# EAGLE board MCDU_PCB (EAGLE 9.7.0)
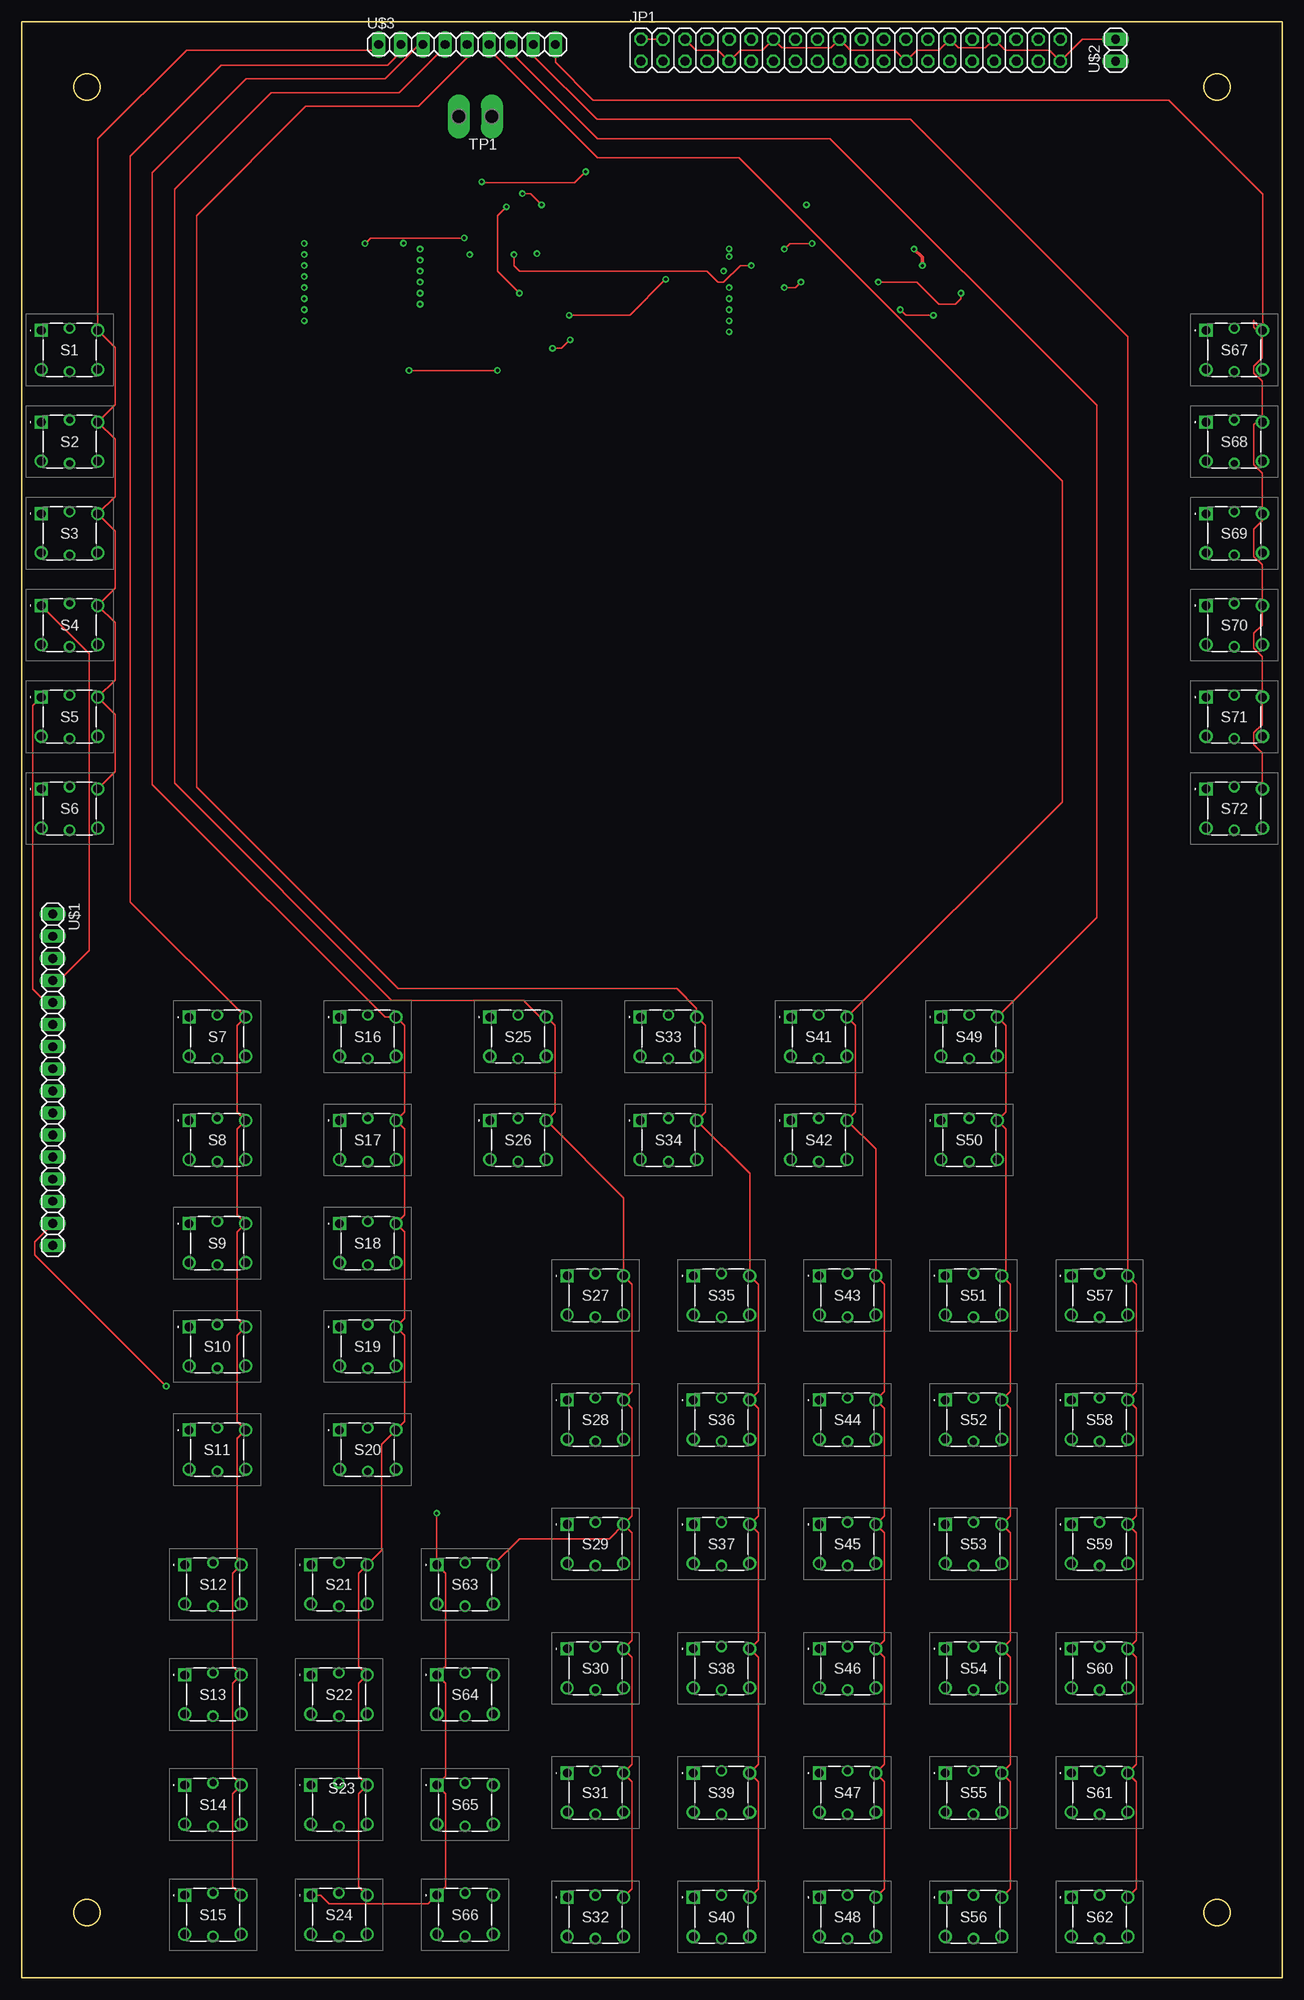
[diagram p0: board, top side]
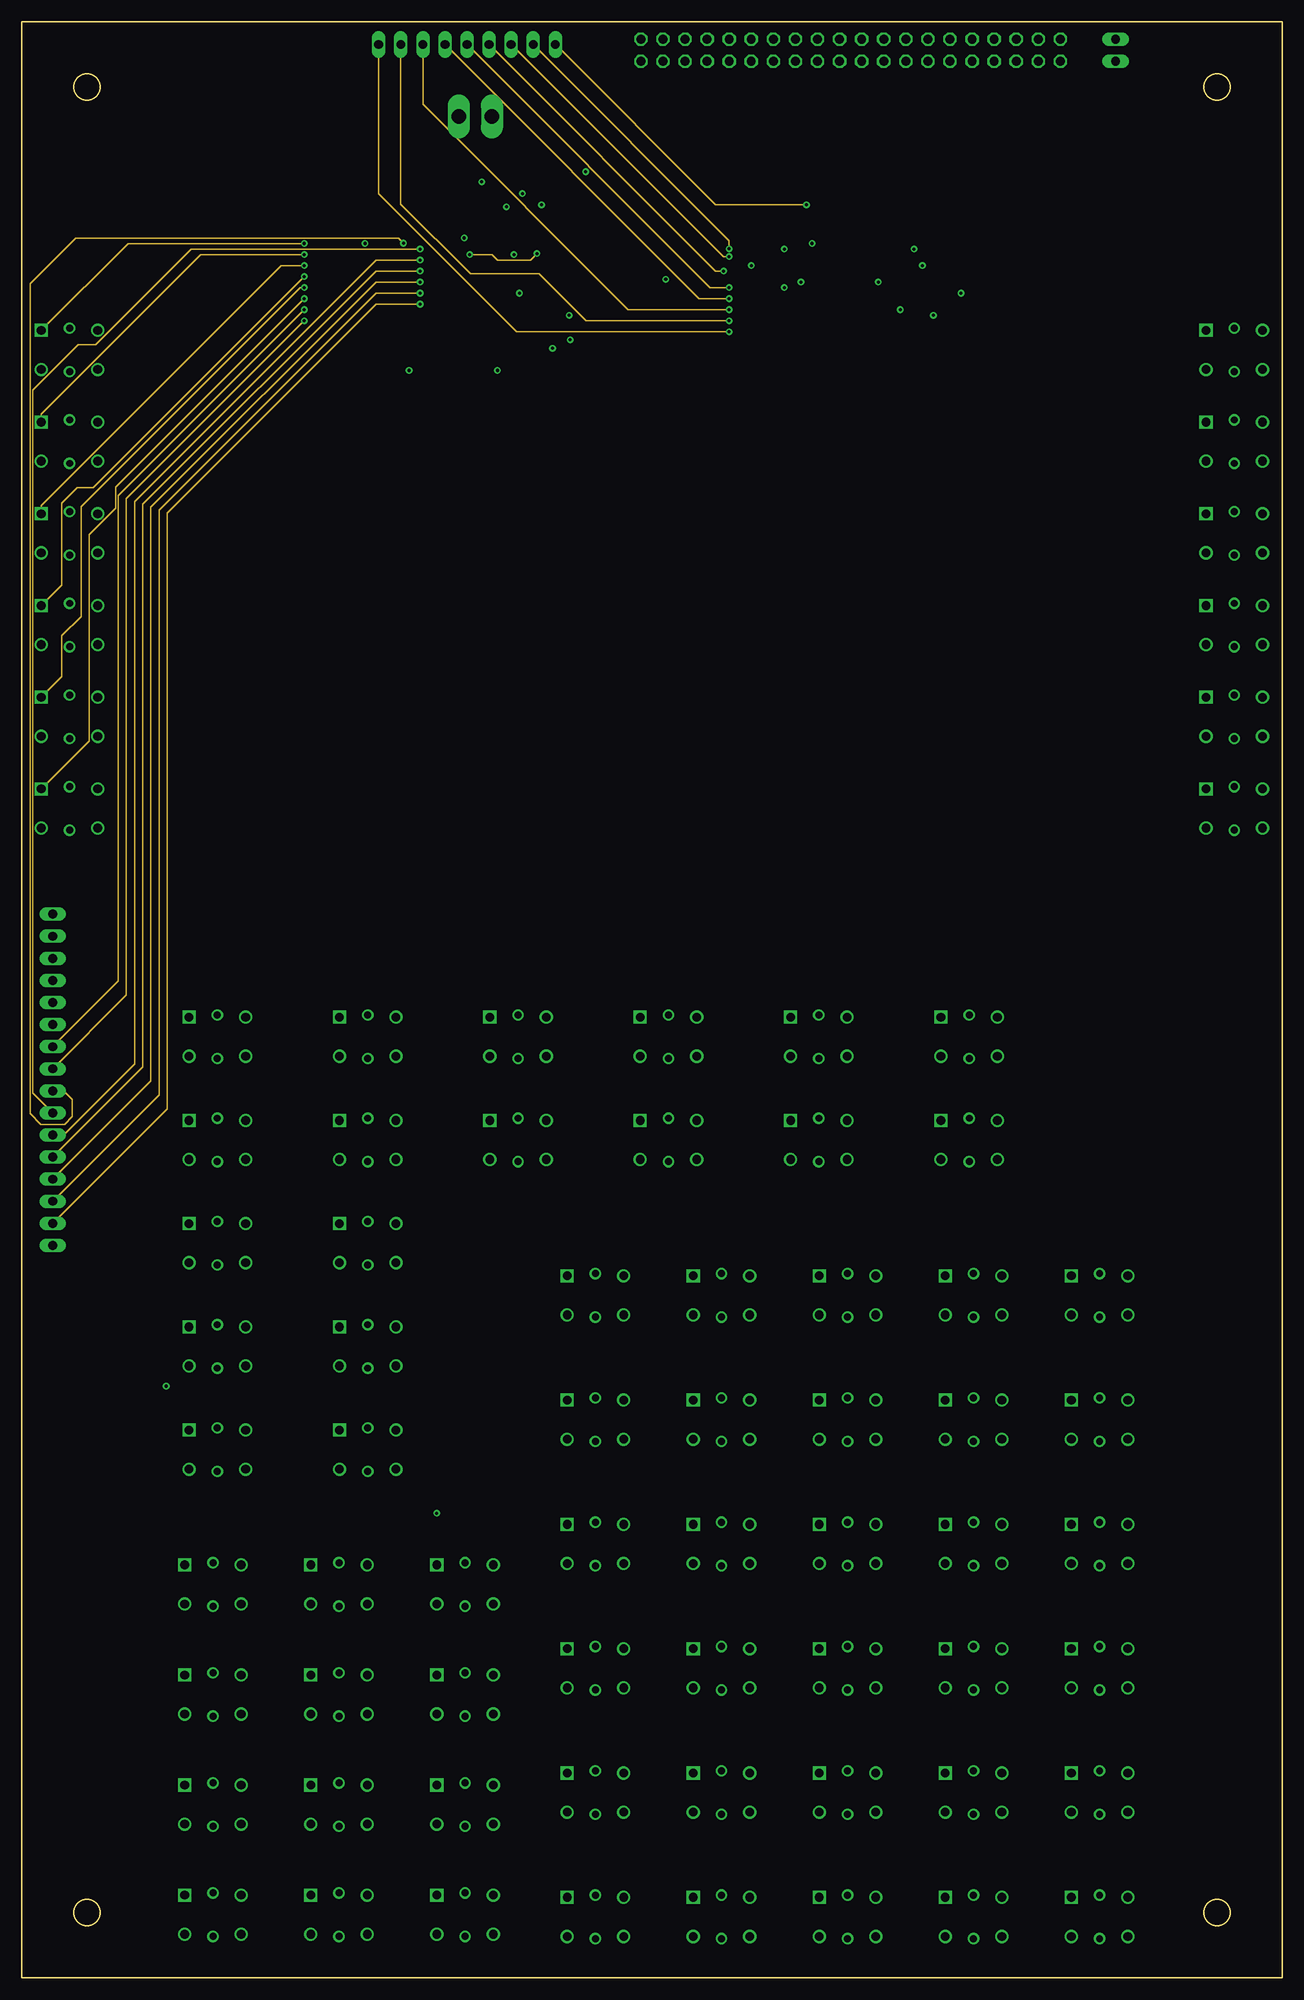
[diagram p1: board, inner layer Route2]
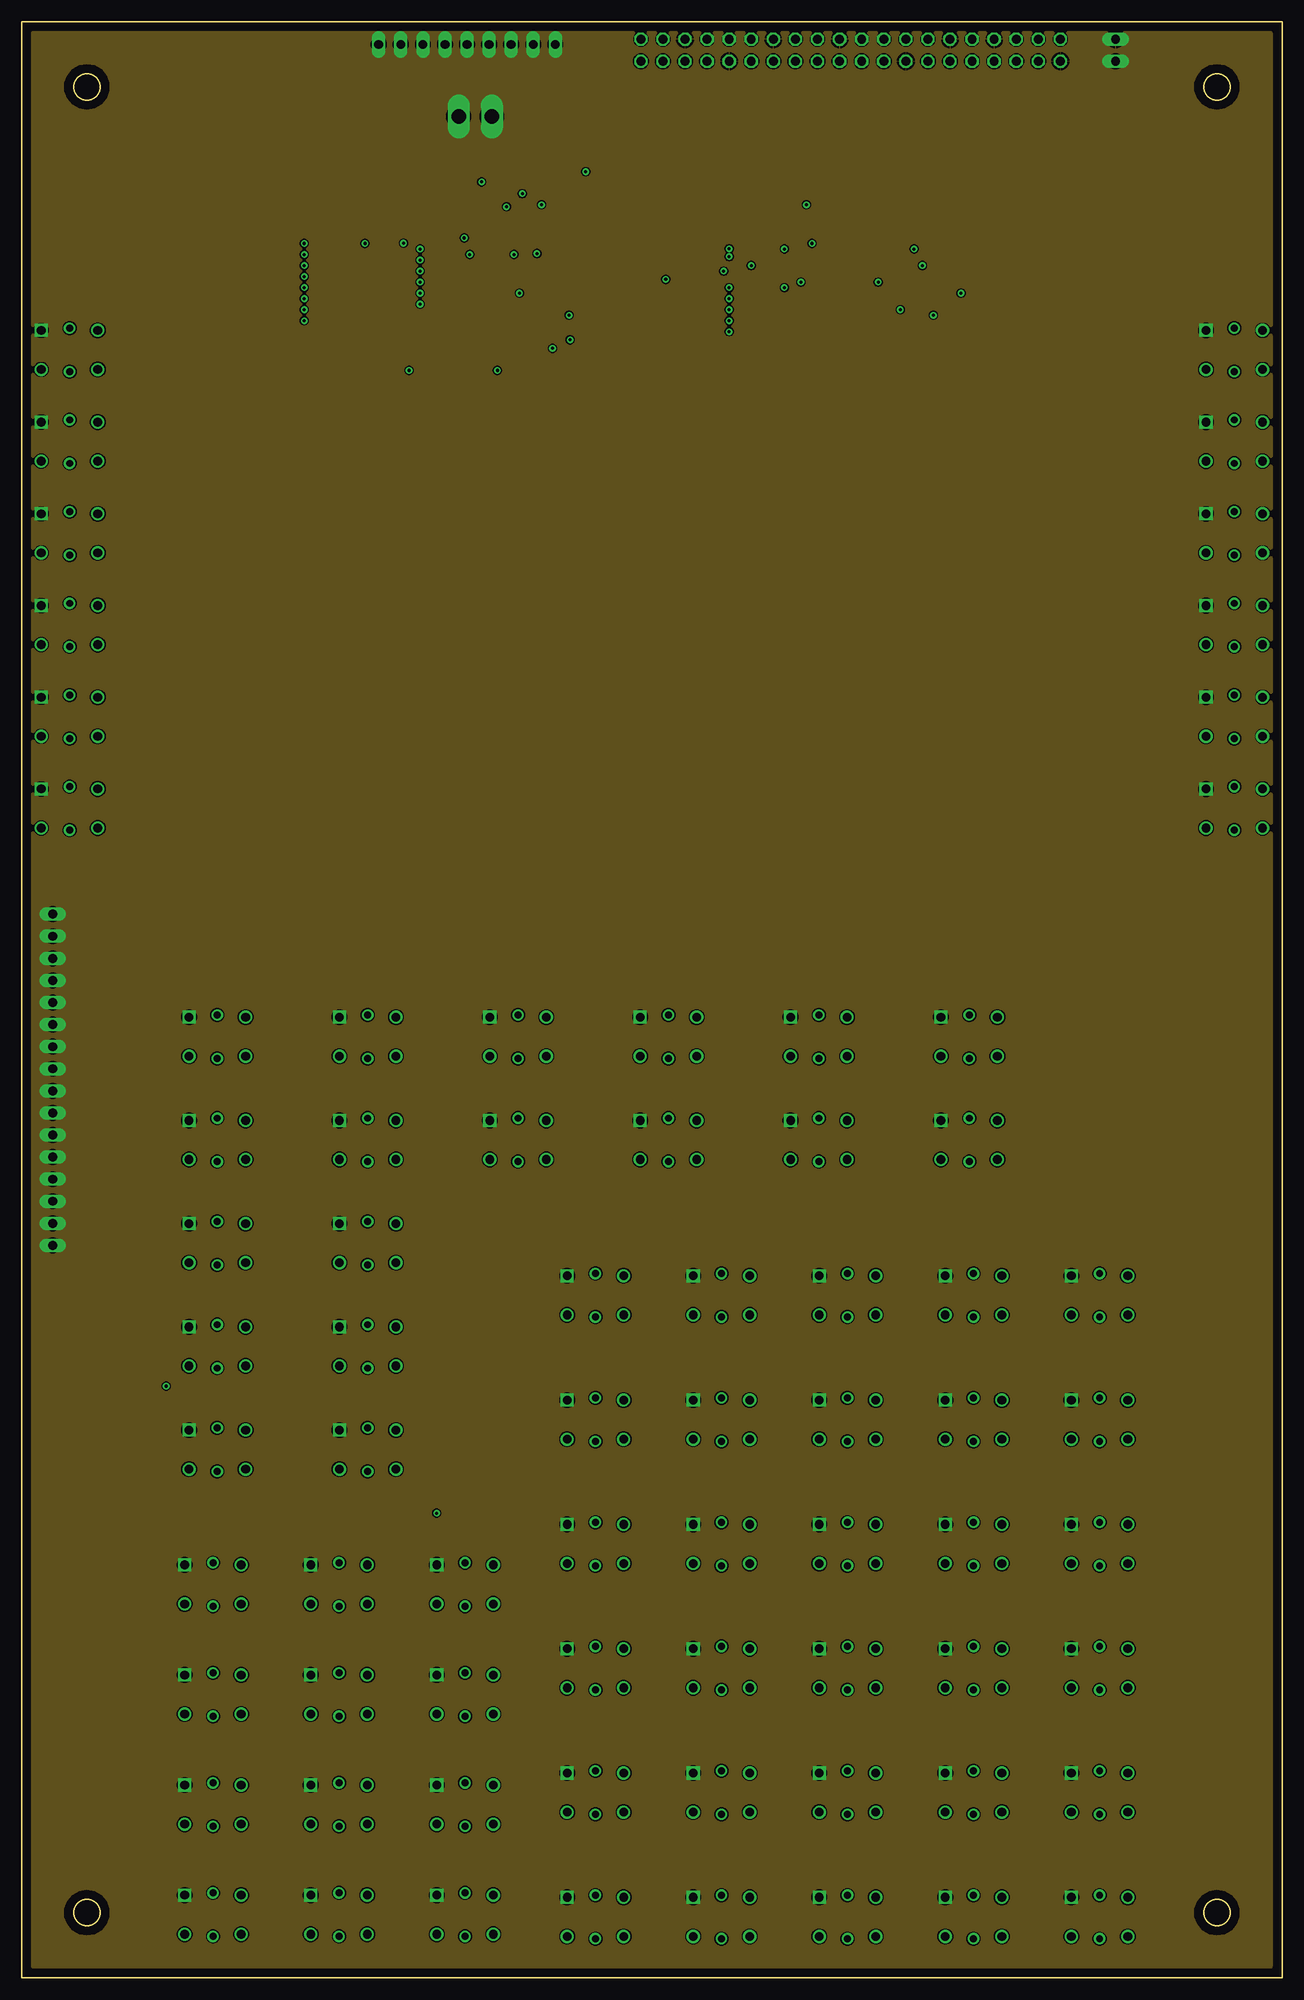
[diagram p2: board, inner layer Route15]
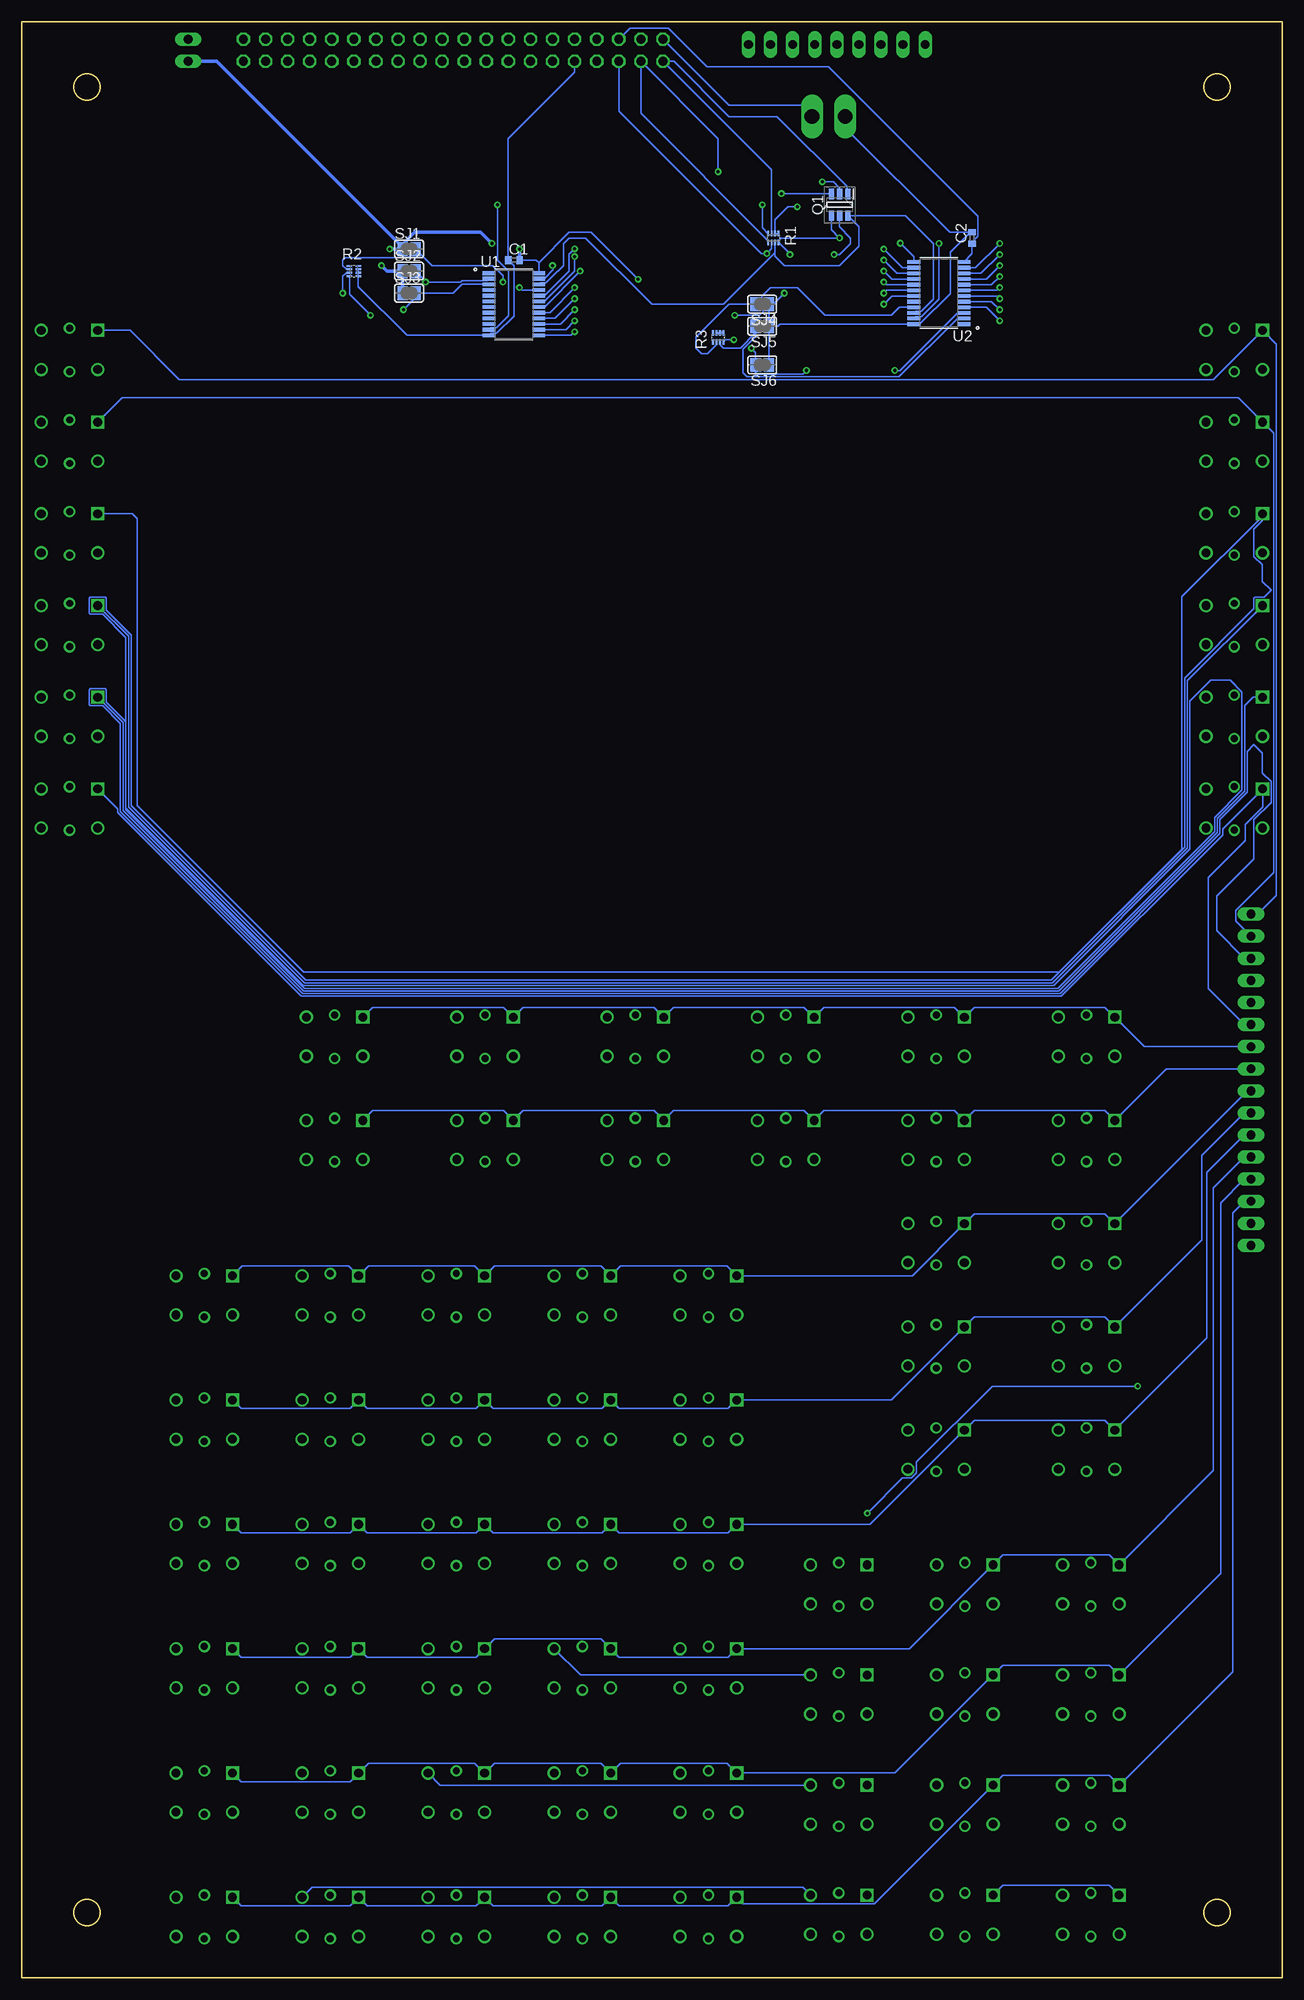
[diagram p3: board, bottom side, seen from below]

Size 145 x 225 mm. Coordinates in mm from the lower left corner, seen from the top.
Outline: 145,0 0,0 0,225 145,225 145,0
Outline: circle at 7.5,217.5 radius 1.5
Outline: circle at 137.5,217.5 radius 1.5
Outline: circle at 7.5,7.5 radius 1.5
Outline: circle at 137.5,7.5 radius 1.5
Copper layers (1+2*15+16): Top / Route2 / Route15 / Bottom
Stack-up 4 Layer Stack: Top SilkScreen Epoxy Ink / Top SolderMask SR:Green 0.0254mm Dk 4.3 / Top Surface Finish Lead-Free 0.02mm / Top CuFoil:007 0.035mm / Dielectric-1 Prepreg:001 0.064mm / Dielectric-2 Prepreg:001 0.064mm / Route2 CuFoil:007 0.035mm / Dielectric-3 Core:066 0.711mm / Route15 CuFoil:007 0.035mm / Dielectric-4 Prepreg:001 0.064mm / Dielectric-5 Prepreg:001 0.064mm / Bottom CuFoil:007 0.035mm / Bottom Surface Finish Lead-Free 0.02mm / Bottom SolderMask SR:Green 0.0254mm Dk 4.3 / Bottom SilkScreen Epoxy Ink
Design rules: minimum copper width 6mil, minimum drill size 0.35mm, copper clearance wire_polygon to wire_polygon 6mil, copper clearance wire_polygon to pad_smd 6mil, copper clearance wire_polygon to via 6mil, copper clearance pad_smd to pad_smd 6mil, copper clearance pad_smd to via 6mil, copper clearance via to via 6mil, copper clearance smd to pad (same net) 6mil, copper clearance smd to via (same net) 6mil, copper clearance smd to smd (same net) 6mil, dimension clearance 12mil, via restrict clearance 0mil, restrict clearance 0mil, drill distance 6mil, keepout clearance 0mil

## Footprints (pad centres in the part's own frame; a part is rotated, then mirrored left to right if it is on the bottom)
C0402 = smd 0.7 x 0.9: 1 -0.65,0; 2 0.65,0
2X20 = drill 1.016 octagon: 1 -24.13,-1.27; 2 -24.13,1.27; 3 -21.59,-1.27; 4 -21.59,1.27; 5 -19.05,-1.27; 6 -19.05,1.27; 7 -16.51,-1.27; 8 -16.51,1.27; 9 -13.97,-1.27; 10 -13.97,1.27; 11 -11.43,-1.27; 12 -11.43,1.27; 13 -8.89,-1.27; 14 -8.89,1.27; 15 -6.35,-1.27; 16 -6.35,1.27; 17 -3.81,-1.27; 18 -3.81,1.27; 19 -1.27,-1.27; 20 -1.27,1.27; 21 1.27,-1.27; 22 1.27,1.27; 23 3.81,-1.27; 24 3.81,1.27; 25 6.35,-1.27; 26 6.35,1.27; 27 8.89,-1.27; 28 8.89,1.27; 29 11.43,-1.27; 30 11.43,1.27; 31 13.97,-1.27; 32 13.97,1.27; 33 16.51,-1.27; 34 16.51,1.27; 35 19.05,-1.27; 36 19.05,1.27; 37 21.59,-1.27; 38 21.59,1.27; 39 24.13,-1.27; 40 24.13,1.27
SOT95P280X110-6N = smd 1.2 x 0.6: 1 -1.25,0.95; 2 -1.25,0; 3 -1.25,-0.95; 4 1.25,-0.95; 5 1.25,0; 6 1.25,0.95
EXB-18V103JX = smd 0.64 x 0.21: 1 -0.505,0.6; 2 -0.505,0.2; 3 -0.505,-0.2; 4 -0.505,-0.6; 5 0.505,-0.6; 6 0.505,-0.2; 7 0.505,0.2; 8 0.505,0.6
FSMIJ63AA04 = drill 1 pad 1.5 square: 1 0,0 | drill 1 pad 1.5: 2 6.5,0; 3 0,-4.5; 4 6.5,-4.5 | drill 0.8 pad 1.3: 5 3.25,-4.75; 6 3.25,0.25
SJ = smd 1.168 x 1.6: 1 -0.762,0; 2 0.762,0
P2-38-17 = drill 1.702 pad 2.121 long: TP-1 -1.905,0; TP-2 1.905,0
SOP65P640X120-24N = smd 1.57 x 0.41: 1 -2.87,3.575; 2 -2.87,2.925; 3 -2.87,2.275; 4 -2.87,1.625; 5 -2.87,0.975; 6 -2.87,0.325; 7 -2.87,-0.325; 8 -2.87,-0.975; 9 -2.87,-1.625; 10 -2.87,-2.275; 11 -2.87,-2.925; 12 -2.87,-3.575; 13 2.87,-3.575; 14 2.87,-2.925; 15 2.87,-2.275; 16 2.87,-1.625; 17 2.87,-0.975; 18 2.87,-0.325; 19 2.87,0.325; 20 2.87,0.975; 21 2.87,1.625; 22 2.87,2.275; 23 2.87,2.925; 24 2.87,3.575
1X16 = drill 1.016 long: 1 -19.05,0; 2 -16.51,0; 3 -13.97,0; 4 -11.43,0; 5 -8.89,0; 6 -6.35,0; 7 -3.81,0; 8 -1.27,0; 9 1.27,0; 10 3.81,0; 11 6.35,0; 12 8.89,0; 13 11.43,0; 14 13.97,0; 15 16.51,0; 16 19.05,0
1X02 = drill 1.016 long: 1 -1.27,0; 2 1.27,0
1X09 = drill 1.016 long: 1 -10.16,0; 2 -7.62,0; 3 -5.08,0; 4 -2.54,0; 5 0,0; 6 2.54,0; 7 5.08,0; 8 7.62,0; 9 10.16,0

## Placement (x,y rotation side)
C1  [C0402]  88.38,197.59 0 bottom
C2  [C0402]  35.67,200.13 90 bottom
JP1  PINHD-2X20  [2X20]  95.36,221.72 0 top
Q1  FDC6301N  [SOT95P280X110-6N]  50.91,203.94 270 bottom
R1  EXB-18V103JX  [EXB-18V103JX]  58.53,200.13 270 bottom
R2  EXB-18V103JX  [EXB-18V103JX]  106.79,196.32 0 bottom
R3  EXB-18V103JX  [EXB-18V103JX]  64.88,188.7 90 bottom
S1  FSMIJ63AA04  [FSMIJ63AA04]  2.25,189.5 0 top
S2  FSMIJ63AA04  [FSMIJ63AA04]  2.25,178.95 0 top
S3  FSMIJ63AA04  [FSMIJ63AA04]  2.25,168.4 0 top
S4  FSMIJ63AA04  [FSMIJ63AA04]  2.25,157.85 0 top
S5  FSMIJ63AA04  [FSMIJ63AA04]  2.25,147.3 0 top
S6  FSMIJ63AA04  [FSMIJ63AA04]  2.25,136.75 0 top
S7  FSMIJ63AA04  [FSMIJ63AA04]  19.25,110.5 0 top
S8  FSMIJ63AA04  [FSMIJ63AA04]  19.25,98.62 0 top
S9  FSMIJ63AA04  [FSMIJ63AA04]  19.25,86.75 0 top
S10  FSMIJ63AA04  [FSMIJ63AA04]  19.25,74.88 0 top
S11  FSMIJ63AA04  [FSMIJ63AA04]  19.25,63 0 top
S12  FSMIJ63AA04  [FSMIJ63AA04]  18.75,47.5 0 top
S13  FSMIJ63AA04  [FSMIJ63AA04]  18.75,34.83 0 top
S14  FSMIJ63AA04  [FSMIJ63AA04]  18.75,22.17 0 top
S15  FSMIJ63AA04  [FSMIJ63AA04]  18.75,9.5 0 top
S16  FSMIJ63AA04  [FSMIJ63AA04]  36.55,110.5 0 top
S17  FSMIJ63AA04  [FSMIJ63AA04]  36.55,98.62 0 top
S18  FSMIJ63AA04  [FSMIJ63AA04]  36.55,86.75 0 top
S19  FSMIJ63AA04  [FSMIJ63AA04]  36.55,74.88 0 top
S20  FSMIJ63AA04  [FSMIJ63AA04]  36.55,63 0 top
S21  FSMIJ63AA04  [FSMIJ63AA04]  33.25,47.5 0 top
S22  FSMIJ63AA04  [FSMIJ63AA04]  33.25,34.83 0 top
S23  FSMIJ63AA04  [FSMIJ63AA04]  33.25,22.17 0 top
S24  FSMIJ63AA04  [FSMIJ63AA04]  33.25,9.5 0 top
S25  FSMIJ63AA04  [FSMIJ63AA04]  53.85,110.5 0 top
S26  FSMIJ63AA04  [FSMIJ63AA04]  53.85,98.62 0 top
S27  FSMIJ63AA04  [FSMIJ63AA04]  62.75,80.75 0 top
S28  FSMIJ63AA04  [FSMIJ63AA04]  62.75,66.45 0 top
S29  FSMIJ63AA04  [FSMIJ63AA04]  62.75,52.15 0 top
S30  FSMIJ63AA04  [FSMIJ63AA04]  62.75,37.85 0 top
S31  FSMIJ63AA04  [FSMIJ63AA04]  62.75,23.55 0 top
S32  FSMIJ63AA04  [FSMIJ63AA04]  62.75,9.25 0 top
S33  FSMIJ63AA04  [FSMIJ63AA04]  71.15,110.5 0 top
S34  FSMIJ63AA04  [FSMIJ63AA04]  71.15,98.62 0 top
S35  FSMIJ63AA04  [FSMIJ63AA04]  77.25,80.75 0 top
S36  FSMIJ63AA04  [FSMIJ63AA04]  77.25,66.45 0 top
S37  FSMIJ63AA04  [FSMIJ63AA04]  77.25,52.15 0 top
S38  FSMIJ63AA04  [FSMIJ63AA04]  77.25,37.85 0 top
S39  FSMIJ63AA04  [FSMIJ63AA04]  77.25,23.55 0 top
S40  FSMIJ63AA04  [FSMIJ63AA04]  77.25,9.25 0 top
S41  FSMIJ63AA04  [FSMIJ63AA04]  88.45,110.5 0 top
S42  FSMIJ63AA04  [FSMIJ63AA04]  88.45,98.62 0 top
S43  FSMIJ63AA04  [FSMIJ63AA04]  91.75,80.75 0 top
S44  FSMIJ63AA04  [FSMIJ63AA04]  91.75,66.45 0 top
S45  FSMIJ63AA04  [FSMIJ63AA04]  91.75,52.15 0 top
S46  FSMIJ63AA04  [FSMIJ63AA04]  91.75,37.85 0 top
S47  FSMIJ63AA04  [FSMIJ63AA04]  91.75,23.55 0 top
S48  FSMIJ63AA04  [FSMIJ63AA04]  91.75,9.25 0 top
S49  FSMIJ63AA04  [FSMIJ63AA04]  105.75,110.5 0 top
S50  FSMIJ63AA04  [FSMIJ63AA04]  105.75,98.62 0 top
S51  FSMIJ63AA04  [FSMIJ63AA04]  106.25,80.75 0 top
S52  FSMIJ63AA04  [FSMIJ63AA04]  106.25,66.45 0 top
S53  FSMIJ63AA04  [FSMIJ63AA04]  106.25,52.15 0 top
S54  FSMIJ63AA04  [FSMIJ63AA04]  106.25,37.85 0 top
S55  FSMIJ63AA04  [FSMIJ63AA04]  106.25,23.55 0 top
S56  FSMIJ63AA04  [FSMIJ63AA04]  106.25,9.25 0 top
S57  FSMIJ63AA04  [FSMIJ63AA04]  120.75,80.75 0 top
S58  FSMIJ63AA04  [FSMIJ63AA04]  120.75,66.45 0 top
S59  FSMIJ63AA04  [FSMIJ63AA04]  120.75,52.15 0 top
S60  FSMIJ63AA04  [FSMIJ63AA04]  120.75,37.85 0 top
S61  FSMIJ63AA04  [FSMIJ63AA04]  120.75,23.55 0 top
S62  FSMIJ63AA04  [FSMIJ63AA04]  120.75,9.25 0 top
S63  FSMIJ63AA04  [FSMIJ63AA04]  47.75,47.5 0 top
S64  FSMIJ63AA04  [FSMIJ63AA04]  47.75,34.83 0 top
S65  FSMIJ63AA04  [FSMIJ63AA04]  47.75,22.17 0 top
S66  FSMIJ63AA04  [FSMIJ63AA04]  47.75,9.5 0 top
S67  FSMIJ63AA04  [FSMIJ63AA04]  136.25,189.5 0 top
S68  FSMIJ63AA04  [FSMIJ63AA04]  136.25,178.95 0 top
S69  FSMIJ63AA04  [FSMIJ63AA04]  136.25,168.4 0 top
S70  FSMIJ63AA04  [FSMIJ63AA04]  136.25,157.85 0 top
S71  FSMIJ63AA04  [FSMIJ63AA04]  136.25,147.3 0 top
S72  FSMIJ63AA04  [FSMIJ63AA04]  136.25,136.75 0 top
SJ1  [SJ]  100.44,198.86 0 bottom
SJ2  [SJ]  100.44,196.32 0 bottom
SJ3  [SJ]  100.44,193.78 0 bottom
SJ4  [SJ]  59.8,192.51 180 bottom
SJ5  [SJ]  59.8,189.97 180 bottom
SJ6  [SJ]  59.8,185.53 180 bottom
TP1  PTR2  [P2-38-17]  52.18,214.1 180 top
U1  TCA9535PWR  [SOP65P640X120-24N]  88.38,192.51 0 bottom
U2  TCA9535PWR  [SOP65P640X120-24N]  39.48,193.78 180 bottom
U$1  PINHD-1X16_1X16M  [1X16]  3.57,103.29 270 top
U$2  PINHD-1X02_1X02M  [1X02]  125.84,221.72 90 top
U$3  PINHD-1X09_1X09M  [1X09]  51.23,222.38 0 top

## Library data of the parts
C1 C2 = rcl; SPICEPREFIX: C
JP1 = Connector; CATEGORY: Headers; DESCRIPTION: Header-Straight-2x20 Position; PACKAGE_TYPE: THT; PITCH: 0.100" (2.54mm); SUBCATEGORY: Headers-Male Pins; TYPE: Board to Board or Cable-Unshrouded-Through Hole-Straight
Q1 = FDC6301N; ARROW_PART_NUMBER: FDC6301N; ARROW_PRICE-STOCK: https://www.arrow.com/en/products/fdc6301n/on-semiconductor?utm_currency=USD&region=europe; DESCRIPTION: 25 V, 0.22 A continuous, 0.5 A Peak ; Very low level gate drive requirements allowing direct operation in 3V circuits. VGS(th) < 1.5V ; Gate-Source Zener for ESD ruggedness. >6kV Human Body Model ; RDS(ON) = 4 @ VGS= 4.5 V; RDS(ON) = 5 @ VGS= 2.7 V; HEIGHT: 1.1mm; MANUFACTURER_NAME: onsemi; MANUFACTURER_PART_NUMBER: FDC6301N; MOUSER_PART_NUMBER: 512-FDC6301N; MOUSER_PRICE-STOCK: https://www.mouser.co.uk/ProductDetail/onsemi-Fairchild/FDC6301N?qs=mdiO5HdF0KgxuYQMe08%2FpQ%3D%3D
R1-R3 = Resistor Array; CREATED_BY: PCBLayout.com; DIGIEKEY_PARTNO: Y6103TR-ND; MANUFACTURER: Panasonic Electronic Components; MPN: EXB-18V103JX; PACKAGE: 0502
S1-S72 = FSMIJ63AA04; DESCRIPTION: Body Features: Product Orientation Vertical | Actuator Color Brown | Actuator Force 9.17 OZ | Actuator Force 260 G | Configuration Features: Operating Function Off (On) | Number of Actuators Single | Configuration (Pole-Throw) Single Pole - Single Throw | Contact Features: Contact Current Rating 50 MAMP | Contact Base Material Brass | Switch Contact Plating Material Silver | Housing Features: Process Sealed No | Product Type Features: Illuminated With | Actuator Style Rectangular | Termination Features: Ter; HEIGHT: 7mm; MANUFACTURER_NAME: TE Connectivity; MANUFACTURER_PART_NUMBER: FSMIJ63AA04; MOUSER_PART_NUMBER: 506-FSMIJ63AA04; MOUSER_PRICE-STOCK: https://www.mouser.co.uk/ProductDetail/TE-Connectivity-AMP/FSMIJ63AA04?qs=oOQ3ApaRe9AOcHRaMIhZDw%3D%3D
SJ1-SJ6 = jumper
TP1 = testpad
U1 U2 = TCA9535PWR; AVAILABILITY: In Stock; CHECK_PRICES: https://www.snapeda.com/parts/TCA9535PWR/Texas+Instruments/view-part/?ref=eda; DESCRIPTION: 16-bit 1.65- to 5.5-V I2C/SMBus I/O expander with interrupt & config registers; MF: Texas Instruments; MP: TCA9535PWR; PACKAGE: TSSOP-24 Texas Instruments; PRICE: None; PURCHASE-URL: https://www.snapeda.com/api/url_track_click_mouser/?unipart_id=1237891&manufacturer=Texas Instruments&part_name=TCA9535PWR&search_term=None; SNAPEDA_LINK: https://www.snapeda.com/parts/TCA9535PWR/Texas+Instruments/view-part/?ref=snap
U$1-U$3 = Tinkercad

## Nets
+3.3V: JP1.1 Q1.1 R1.3
GND: C1.1 C2.1 JP1.6 JP1.9 JP1.14 JP1.20 JP1.25 JP1.30 JP1.34 JP1.39 R2.5 R2.6 R2.7 U1.12 U2.12 U$2.2
GND1: R3.5 R3.6 R3.7
N$1: S1.2 S2.2 S3.2 S4.2 S5.2 S6.2 U1.13 U$3.1
N$2: S7.2 S8.2 S9.2 S10.2 S11.2 S12.2 S13.2 S14.2 S15.2 U1.14 U$3.2
N$3: S16.2 S17.2 S18.2 S19.2 S20.2 S21.2 S22.2 S23.2 S24.2 U1.15 U$3.3
N$4: S25.2 S26.2 S27.2 S28.2 S29.2 S30.2 S31.2 S32.2 S63.2 U1.16 U$3.4
N$5: S33.2 S34.2 S35.2 S36.2 S37.2 S38.2 S39.2 S40.2 S64.2 U1.17 U$3.5
N$6: S41.2 S42.2 S43.2 S44.2 S45.2 S46.2 S47.2 S48.2 S65.2 U1.18 U$3.6
N$7: S49.2 S50.2 S51.2 S52.2 S53.2 S54.2 S55.2 S56.2 S66.2 U1.19 U$3.7
N$8: S57.2 S58.2 S59.2 S60.2 S61.2 S62.2 U1.20 U$3.8
N$9: S67.2 S68.2 S69.2 S70.2 S71.2 S72.2 U1.11 U$3.9
N$10: S1.1 S67.1 U2.11 U$1.1
N$11: S2.1 S68.1 U2.10 U$1.2
N$12: S3.1 S69.1 U2.9 U$1.3
N$13: S4.1 S70.1 U2.8 U$1.4
N$14: S5.1 S71.1 U2.7 U$1.5
N$15: S6.1 S72.1 U2.6 U$1.6
N$16: S7.1 S16.1 S25.1 S33.1 S41.1 S49.1 U2.5 U$1.7
N$17: S8.1 S17.1 S26.1 S34.1 S42.1 S50.1 U2.4 U$1.8
N$18: S9.1 S18.1 S27.1 S35.1 S43.1 S51.1 S57.1 U2.13 U$1.9
N$19: S10.1 S19.1 S28.1 S36.1 S44.1 S52.1 S58.1 U2.14 U$1.10
N$20: S11.1 S20.1 S29.1 S37.1 S45.1 S53.1 S59.1 U2.15 U$1.11
N$21: S12.1 S21.1 S30.1 S38.1 S46.1 S54.1 S60.1 U2.16 U$1.12
N$22: S13.1 S22.1 S31.1 S39.1 S47.1 S55.1 S61.1 U2.17 U$1.13
N$23: S14.1 S23.1 S32.1 S40.1 S48.1 S56.1 S62.1 U2.18 U$1.14
N$24: S15.1 S24.1 S63.1 S64.1 S65.1 S66.1 U2.19 U$1.15
N$26: S57.3
N$27: JP1.2 JP1.4 TP1.TP-1
N$28: JP1.5 Q1.5 R1.6
N$29: JP1.3 Q1.2 R1.5
N$30: Q1.3 R1.4
N$31: Q1.6 R1.7 U1.22 U2.22
N$32: Q1.4 R1.8 U1.23 U2.23
N$33: R2.2 SJ1.2 U1.21
N$34: R2.3 SJ2.2 U1.2
N$35: R2.4 SJ3.2 U1.3
N$36: R3.2 SJ4.2 U2.21
N$37: R3.3 SJ5.2 U2.2
N$38: R3.4 SJ6.2 U2.3
VDD: C1.2 C2.2 R1.1 R1.2 SJ1.1 SJ2.1 SJ3.1 SJ4.1 SJ5.1 SJ6.1 TP1.TP-2 U1.24 U2.24 U$2.1

## Tracks (layer width: path | path; a pad name or v marks a point on that pad's centre or on a via)
+3.3V
  Bottom 0.152: R1.3 58.73,207.95 JP1.1 69.96,220.45 63.61,214.1 58.1,214.1 50.06,206.06 50.06,205.29 Q1.1
GND
  Top 0.152: JP1.6 77.58,221.72 80.12,221.72 JP1.9 82.66,221.72 85.2,221.72 JP1.14 87.46,222 93.1,222 JP1.20 95.36,221.72 100.44,221.72 JP1.25 102.98,221.72 105.52,221.72 JP1.30 107.78,222 110.88,222 JP1.34 113.14,221.72 118.22,221.72 JP1.39 122.03,222.99 U$2.2
  Bottom 0.152: U2.12 35.67,198.3 C2.1 35.67,199.66 34.99,200.33 34.99,202.63 52.18,219.81 66.15,219.81 70.59,224.26 75.04,224.26 JP1.6 | R2.7 R2.6 R2.5 106.28,194.55 100.67,188.94 U1.12 91.03,189.15 90.39,189.15 88.39,191.16 88.39,196.95 C1.1 89.03,211.55 81.39,219.18 JP1.9
  pour Route15: 0.11,224.89 144.89,224.89 144.89,0.11 0.11,0.11
GND1
  Bottom 0.254: R3.7 R3.6 R3.5
N$1  (via drill 0.35)
  Top 0.152: U$3.1 40.43,221.75 18.97,221.75 8.75,211.53 S1.2 10.73,187.52 10.73,180.93 S2.2 10.73,176.97 10.73,170.38 S3.2 10.73,166.42 10.73,159.83 S4.2 10.73,155.87 10.73,149.28 S5.2 10.73,145.32 10.73,138.73 S6.2
  Route2 0.152: v81.39,189.33 56.92,189.33 41.07,205.19 U$3.1
  Bottom 0.152: U1.13 81.79,188.94 v81.39,189.33
N$2  (via drill 0.35)
  Top 0.152: S15.2 24.27,10.48 24.27,21.18 S14.2 24.27,23.15 24.27,33.85 S13.2 24.27,35.82 24.27,46.52 S12.2 24.77,47.98 24.77,62.02 S11.2 24.77,63.98 24.77,73.89 S10.2 24.77,75.86 24.77,85.77 S9.2 24.77,87.73 24.77,97.64 S8.2 24.77,99.61 24.77,109.52 S7.2 12.49,123.76 12.49,209.56 22.93,220 42.11,220 43.61,221.49 U$3.2
  Route2 0.152: v81.39,190.61 64.93,190.61 59.53,196 51.64,196 43.61,204.03 U$3.2
  Bottom 0.152: U1.14 82.41,189.58 v81.39,190.61
N$3  (via drill 0.35)
  Top 0.152: S24.2 38.77,10.48 38.77,21.18 S23.2 38.77,23.15 38.77,33.85 S22.2 38.77,35.82 38.77,46.52 S21.2 41.4,49.15 41.4,61.35 S20.2 44.03,63.98 44.03,73.89 S19.2 44.03,75.86 44.03,85.77 S18.2 44.03,87.73 44.03,97.64 S17.2 44.03,99.61 44.03,109.52 S16.2 41.78,110.5 15.03,137.25 15.03,207.65 25.8,218.42 41.81,218.42 45.77,222.38 U$3.3
  Route2 0.152: v81.39,191.88 69.77,191.88 46.15,215.5 U$3.3
  Route15 0.152: 46.21,222.38 U$3.3
  Bottom 0.152: U1.15 83.03,190.24 v81.39,191.88
N$4  (via drill 0.35)
  Top 0.152: S29.2 70.23,53.13 70.23,65.47 S28.2 70.23,67.43 70.23,79.77 S27.2 69.25,89.72 S26.2 61.33,99.61 61.33,109.52 S25.2 59.64,110.5 57.73,112.41 42.57,112.41 17.57,137.4 17.57,205.75 28.67,216.85 43.41,216.85 48.69,222.13 U$3.4 | S29.2 70.23,51.17 70.23,38.83 S30.2 70.23,36.87 70.23,24.53 S31.2 70.23,22.57 70.23,10.23 S32.2 | S63.2 57.25,50.5 67.6,50.5 S29.2
  Route2 0.152: v81.39,193.14 77.93,193.14 U$3.4
  Bottom 0.152: U1.16 83.65,190.88 v81.39,193.14
N$5  (via drill 0.35)
  Top 0.152: S40.2 84.73,10.23 84.73,22.57 S39.2 84.73,24.53 84.73,36.87 S38.2 84.73,38.83 84.73,51.17 S37.2 84.73,53.13 84.73,65.47 S36.2 84.73,67.43 84.73,79.77 S35.2 83.75,92.53 S34.2 78.63,99.61 78.63,109.52 S33.2 77.65,111.52 75.4,113.77 43.29,113.77 20.11,136.95 20.11,202.7 32.69,215.27 45.64,215.27 51.23,220.86 U$3.5
  Route2 0.152: v81.39,194.42 79.2,194.42 U$3.5
  Bottom 0.152: S64.2 80.73,34.83 S38.2 | U1.17 84.24,191.53 81.39,194.38 v81.39,194.42
N$6  (via drill 0.35)
  Top 0.152: S48.2 99.23,10.23 99.23,22.57 S47.2 99.23,24.53 99.23,36.87 S46.2 99.23,38.83 99.23,51.17 S45.2 99.23,53.13 99.23,65.47 S44.2 99.23,67.43 99.23,79.77 S43.2 98.25,95.33 S42.2 95.93,99.61 95.93,109.52 S41.2 119.72,135.26 119.72,172.16 82.51,209.36 66.21,209.36 53.77,221.81 U$3.6
  Route2 0.152: v80.75,196.32 79.83,196.32 U$3.6
  Bottom 0.152: S65.2 96.87,22.17 S47.2 | U1.18 84.87,192.19 80.75,196.3 v80.75,196.32
N$7  (via drill 0.35)
  Top 0.152: S56.2 113.73,10.23 113.73,22.57 S55.2 113.73,24.53 113.73,36.87 S54.2 113.73,38.83 113.73,51.17 S53.2 113.73,53.13 113.73,65.47 S52.2 113.73,67.43 113.73,79.77 S51.2 113.23,81.23 113.23,97.64 S50.2 113.23,99.61 113.23,109.52 S49.2 123.68,121.93 123.68,180.89 93,211.57 66.23,211.57 56.31,221.49 U$3.7
  Route2 0.152: v81.39,197.98 80.71,197.98 U$3.7
  Bottom 0.152: S66.2 55.13,10.38 111.62,10.38 S56.2 | U1.19 84.87,192.83 81.39,196.32 v81.39,197.98
N$8  (via drill 0.35)
  Top 0.152: S62.2 128.23,10.23 128.23,22.57 S61.2 128.23,24.53 128.23,36.87 S60.2 128.23,38.83 128.23,51.17 S59.2 128.23,53.13 128.23,65.47 S58.2 128.23,67.43 128.23,79.77 S57.2 127.25,188.75 102.22,213.78 66.18,213.78 58.85,221.11 U$3.8
  Route2 0.152: v81.39,198.89 81.39,199.84 U$3.8
  Bottom 0.152: 84.87,193.49 U1.20 84.86,193.49 82.03,196.32 82.03,198.25 v81.39,198.89
N$9  (via drill 0.35)
  Top 0.152: S72.2 142.73,136.77 142.73,140.88 141.77,141.84 141.77,143.21 142.73,144.17 142.73,147.28 S71.2 142.73,147.32 142.73,151.98 141.77,152.94 141.77,154.66 142.73,155.62 142.73,157.83 S70.2 142.73,157.87 142.73,162.53 141.77,163.49 141.77,166.66 142.73,167.62 142.73,168.38 S69.2 142.73,168.42 142.73,173.08 141.77,174.04 141.77,178.66 142.06,178.95 S68.2 142.73,178.97 142.73,183.63 141.77,184.59 141.77,185.41 142.73,186.37 142.73,188.88 141.77,189.84 141.77,190.66 141.68,190.57 S67.2 142.75,205.18 131.94,215.99 65.72,215.99 61.39,220.32 U$3.9
  Route2 0.152: v90.28,203.94 79.83,203.94 U$3.9
  Bottom 0.152: U1.11 91.03,189.8 90.39,189.8 89.01,191.19 89.01,196.32 90.28,197.59 v90.28,203.94
N$10  (via drill 0.35)
  Route2 0.152: v32.49,199.5 12.24,199.5 S1.1
  Bottom 0.152: U$1.1 2.81,122.34 0.66,124.49 0.66,187.91 S1.1 7.89,183.86 126.9,183.86 132.54,189.5 S67.1 | U2.11 35.28,196.7 v32.49,199.5
N$11  (via drill 0.35)
  Route2 0.152: v32.49,198.22 20.59,198.22 2.25,179.89 S2.1
  Bottom 0.152: U$1.2 5.32,121.56 5.32,122.75 0.96,127.11 0.96,177.66 S2.1 5.07,181.77 133.43,181.77 S68.1 | U2.10 34.66,196.06 v32.49,198.22
N$12  (via drill 0.35)
  Route2 0.152: v32.49,196.95 29.87,196.95 2.25,169.34 S3.1
  Bottom 0.152: U$1.3 4.33,117.26 7.53,120.46 7.53,124.4 3.23,128.7 3.23,133.23 1.27,135.19 1.27,137.6 2.27,138.6 2.27,140.88 3.23,141.84 4.01,141.07 4.01,136.38 7.16,133.23 7.16,131.59 25.54,113.21 112.71,113.21 133.65,134.15 133.65,144.27 135.7,146.32 137.1,146.32 137.23,146.45 137.23,148.15 137.1,148.28 135.4,148.28 135.27,148.15 135.27,146.75 133.04,144.52 133.04,134.4 112.45,113.82 25.79,113.82 7.77,131.84 7.77,133.48 4.62,136.63 4.62,147.92 5.95,149.25 8.19,149.25 10.6,146.84 10.6,129.83 26.28,114.15 112.6,114.15 133.01,134.56 133.01,154.18 135.7,156.87 137.1,156.87 137.23,157 137.23,158.7 137.1,158.83 135.4,158.83 135.27,158.7 135.27,157.3 132.41,154.44 132.41,134.81 112.35,114.76 26.54,114.76 11.21,130.08 11.21,149.5 3.23,157.48 3.23,158.7 3.1,158.83 2.03,158.83 1.27,159.6 2.27,160.6 2.27,162.53 3.23,163.49 3.23,166.66 2.27,167.62 2.27,168.38 S3.1 2.25,168.15 11.54,158.86 11.54,129.75 25.62,115.67 112.56,115.67 131.73,134.84 131.73,167.86 132.26,168.4 S69.1 | U2.9 34.05,195.41 v32.49,196.95
N$13  (via drill 0.35)
  Top 0.152: U$1.4 4.33,114.72 7.77,118.16 7.77,152.33 S4.1
  Route2 0.152: v32.49,195.69 8.21,171.4 6.37,171.4 4.62,169.65 4.62,160.22 S4.1
  Bottom 0.152: U2.8 33.42,194.75 v32.49,195.69 | S70.1 132.71,154.31 132.71,134.69 112.48,114.45 26.41,114.45 10.91,129.96 10.91,149.19 S4.1
N$14  (via drill 0.35)
  Top 0.152: U$1.5 2.81,112.18 1.27,113.72 1.27,146.32 S5.1
  Route2 0.152: v32.49,194.42 32.02,194.42 6.83,169.22 6.83,156.58 4.62,154.37 4.62,149.67 S5.1
  Bottom 0.152: S71.1 133.34,144.4 133.34,134.28 112.58,113.51 25.67,113.51 7.46,131.72 7.46,133.36 4.31,136.51 4.31,146.32 3.33,147.3 S5.1 | U2.7 32.8,194.11 v32.49,194.42
N$15  (via drill 0.35)
  Route2 0.152: v32.49,193.14 10.8,171.45 10.8,169.06 7.77,166.03 7.77,142.27 S6.1
  Bottom 0.152: U$1.6 4.33,109.64 8.47,113.78 8.47,126.58 4.23,130.81 4.23,132.66 2.25,134.64 S6.1 6.85,132.15 6.85,131.46 25.41,112.9 112.83,112.9 133.95,134.02 133.95,134.45 S72.1 | U2.6 32.8,193.45 v32.49,193.14
N$16  (via drill 0.35)
  Route2 0.152: U$1.7 11.1,114.64 11.1,170.49 v32.49,191.88
  Bottom 0.152: S49.1 104.62,111.63 89.58,111.63 S41.1 87.32,111.63 72.28,111.63 S33.1 70.02,111.63 54.98,111.63 S25.1 52.72,111.63 37.68,111.63 S16.1 35.42,111.63 20.38,111.63 S7.1 15.85,107.1 U$1.7 | U2.5 33.42,192.81 v32.49,191.88
N$17  (via drill 0.35)
  Route2 0.152: U$1.8 12.05,113.04 12.05,170.16 v32.49,190.61
  Bottom 0.152: S50.1 104.62,99.76 89.58,99.76 S42.1 87.32,99.76 72.28,99.76 S34.1 70.02,99.76 54.98,99.76 S26.1 52.72,99.76 37.68,99.76 S17.1 35.42,99.76 20.38,99.76 S8.1 13.31,104.56 U$1.8 | U2.4 34.05,192.16 v32.49,190.61
N$18  (via drill 0.35)
  Route2 0.152: U$1.9 4.84,102.02 5.83,101.03 5.83,99.07 4.93,98.17 2.21,98.17 0.96,99.42 0.96,194.85 6.21,200.1 43.35,200.1 v43.92,199.52
  Bottom 0.152: S57.1 119.62,81.88 107.38,81.88 S51.1 105.12,81.88 92.88,81.88 S43.1 90.62,81.88 78.38,81.88 S35.1 76.12,81.88 63.88,81.88 S27.1 42.55,80.75 S18.1 35.42,87.88 20.38,87.88 S9.1 4.33,101.67 4.33,102.02 U$1.9 | v43.92,199.52 42.35,197.95 U2.13
N$19  (via drill 0.35)
  Route2 0.152: U$1.10 1.27,101.78 1.27,182.63 6.5,187.86 8.52,187.86 19.52,198.86 v45.83,198.86
  Bottom 0.152: S58.1 119.77,65.47 107.23,65.47 S52.1 105.27,65.47 92.73,65.47 S44.1 90.77,65.47 78.23,65.47 S36.1 76.27,65.47 63.73,65.47 S28.1 44.98,66.45 S19.1 35.42,76.01 20.38,76.01 S10.1 9.25,84.88 9.25,94.56 4.33,99.48 U$1.10 | U2.14 43.67,196.7 v45.83,198.86
N$20  (via drill 0.35)
  Route2 0.152: v45.83,197.59 40.75,197.59 12.98,169.82 12.98,105.09 4.84,96.94 U$1.11
  Bottom 0.152: S59.1 119.77,51.17 107.23,51.17 S53.1 105.27,51.17 92.73,51.17 S45.1 90.77,51.17 78.23,51.17 S37.1 76.27,51.17 63.73,51.17 S29.1 47.4,52.15 S20.1 35.42,64.13 20.38,64.13 S11.1 8.66,73.59 8.66,92.62 4.33,96.94 U$1.11 | U2.15 44.3,196.06 v45.83,197.59
N$21  (via drill 0.35)
  Route2 0.152: v45.83,196.32 40.75,196.32 13.92,169.49 13.92,104.76 U$1.12
  Bottom 0.152: S60.1 119.77,36.87 107.23,36.87 S54.1 105.27,36.87 92.73,36.87 S46.1 90.62,38.98 78.38,38.98 S38.1 76.27,36.87 63.73,36.87 S30.1 42.9,37.85 S21.1 32.12,48.63 19.88,48.63 S12.1 7.91,58.34 7.91,90.83 4.33,94.4 U$1.12 | U2.16 44.91,195.41 v45.83,196.32
N$22  (via drill 0.35)
  Route2 0.152: v45.83,195.05 40.75,195.05 14.86,169.16 14.86,103.16 U$1.13
  Bottom 0.152: S61.1 119.77,22.57 107.23,22.57 S55.1 105.12,24.68 92.88,24.68 S47.1 90.62,24.68 78.38,24.68 S39.1 76.12,24.68 63.88,24.68 S31.1 44.53,23.55 S22.1 32.12,35.97 19.88,35.97 S13.1 7.07,46.51 7.07,89.12 4.33,91.86 U$1.13 | U2.17 45.53,194.75 v45.83,195.05
N$23  (via drill 0.35)
  Route2 0.152: U$1.14 15.8,101.56 15.8,168.83 40.75,193.78 v45.83,193.78
  Bottom 0.152: S62.1 119.77,8.27 107.23,8.27 S56.1 105.27,8.27 92.73,8.27 S48.1 90.77,8.27 78.23,8.27 S40.1 76.27,8.27 63.73,8.27 S32.1 62.02,8.52 46.9,8.52 S23.1 32.12,23.3 19.88,23.3 S14.1 5.7,35.22 5.7,87.95 4.33,89.32 U$1.14 | U2.18 45.5,194.11 v45.83,193.78
N$24  (via drill 0.35)
  Top 0.152: U$1.15 3.57,86.72 1.5,84.65 1.5,83.17 v16.62,68.05 | v47.73,53.45 47.73,47.52 S63.1 48.73,46.52 48.73,35.82 S64.1 48.73,33.85 48.73,23.15 S65.1 48.73,21.18 48.73,10.48 S66.1 46.77,8.52 35.37,8.52 34.38,9.5 S24.1
  Route2 0.152: U$1.15 16.74,99.96 16.74,168.5 40.75,192.51 v45.83,192.51
  Bottom 0.152: S15.1 19.88,10.63 32.12,10.63 S24.1 | v47.73,53.45 43.66,57.52 42.64,57.52 42.07,58.09 42.07,59.31 33.33,68.05 v16.62,68.05 | U2.19 44.89,193.45 v45.83,192.51
N$27
  Top 0.152: JP1.4 JP1.2
  Bottom 0.152: JP1.2 63.62,215.38 54.09,215.38 TP1.TP-1
N$28  (via drill 0.35)
  Route2 0.152: v51.55,198.22 54.09,198.22 54.72,197.59 58.53,197.59 v59.28,198.34
  Bottom 0.152: Q1.5 50.91,201.4 49.64,200.13 49.64,199.5 50.91,198.22 v51.55,198.22 | R1.6 58.73,198.88 v59.28,198.34 59.91,198.34 76.31,214.74 JP1.5
N$29  (via drill 0.35)
  Top 0.152: v64.88,207.75 63.61,206.48 53,206.48 v52.91,206.57
  Bottom 0.152: R1.5 59.13,199.84 73.77,214.48 JP1.3 64.88,211.56 v64.88,207.75 | Q1.2 50.91,205.84 51.64,206.57 v52.91,206.57
N$30  (via drill 0.35)
  Top 0.152: v59.8,203.94 58.53,205.21 57.61,205.21 v57.59,205.23
  Bottom 0.152: Q1.3 51.88,205.21 57.58,205.21 v57.59,205.23 | v59.8,203.94 59.8,201.31 R1.4
N$31
  Bottom 0.152: U2.22 42.13,191.72 41.5,191.72 40.12,193.11 40.12,199.5 43.31,202.69 Q1.6 48.69,201.42 48.69,199.18 50.91,196.95 57.26,196.95 58.33,198.03 58.33,198.43 | R1.7 58.33,199.5 58.33,198.43 | U1.22 85.29,195 84.66,195 83.34,196.32 83.3,196.32 82.66,196.95 82.66,199.5 82.03,200.13 80.12,200.13 72.5,192.51 64.25,192.51 58.33,198.43
N$32  (via drill 0.35)
  Top 0.152: v39.48,199.5 40.12,200.13 v50.91,200.13 | v56.62,198.22 56.62,196.95 57.26,196.32 78.85,196.32 80.12,195.05 80.75,195.05 82.66,196.95 v83.93,196.95
  Bottom 0.152: U2.23 42.13,191.07 41.5,191.07 39.48,193.09 v39.48,199.5 | Q1.4 51.86,201.08 v50.91,200.13 57.64,200.13 57.93,199.84 R1.8 56.62,198.32 v56.62,198.22 | v83.93,196.95 83.86,196.88 83.86,196.45 84.87,195.44 U1.23
N$33  (via drill 0.35)
  Top 0.152: v89.64,195.05 89.01,194.42 v87.74,194.42
  Bottom 0.152: R2.2 107.36,196.59 107.71,196.59 108.06,196.94 108.06,197.59 107.82,197.83 100.52,197.83 99.59,198.77 SJ1.2 97.77,196.95 90.83,196.95 89.64,195.77 v89.64,195.05 | v87.74,194.42 87.46,194.13 U1.21
N$34  (via drill 0.35)
  Top 0.152: v108.06,193.78 108.06,193.14 107.42,192.51 105.52,192.51 102.98,195.05 v98.53,195.05
  Bottom 0.152: R2.3 107.36,196.05 107.71,196.05 108.06,195.7 v108.06,193.78 | U1.2 91.46,195.22 94.35,195.22 94.52,195.05 v98.53,195.05 98.53,195.18 SJ2.2
N$35  (via drill 0.35)
  Top 0.152: v104.88,191.24 101.71,191.24 v101.08,191.88
  Bottom 0.152: R2.4 107.3,193.65 v104.88,191.24 | v101.08,191.88 99.68,193.27 SJ3.2 95.36,193.78 94.36,194.78 U1.3
N$36
  Bottom 0.152: SJ4.2 60.56,192.29 | 43.11,192.16 U2.21 44.06,192.16 44.94,191.27 52.62,191.27 55.74,194.39 58.87,194.39 59.85,193.41 59.85,193.22 SJ4.2 | SJ4.2 63.61,192.51 67.42,188.7 67.42,187.43 66.78,186.8 66.13,186.8 65.08,187.85 R3.2
N$37
  Bottom 0.152: U2.2 37.37,190.86 44.06,184.16 61.54,184.16 62.01,184.63 62.01,187.35 60.56,188.8 SJ5.2 60.56,189.21 62.34,187.43 64.26,187.43 64.61,187.78 64.61,188.13 R3.3
N$38  (via drill 0.35)
  Top 0.152: v54.72,184.89 v44.56,184.89 | v61.07,187.43 62.11,187.43 v63.09,188.41
  Bottom 0.152: SJ6.2 60.56,185.74 | U2.3 37.37,191.5 43.98,184.89 v44.56,184.89 | SJ6.2 60.56,186.92 v61.07,187.43 | R3.4 64.06,188.41 v63.09,188.41 | v54.72,184.89 55.14,184.47 60.32,184.47 60.56,184.71 SJ6.2
VDD  (via drill 0.35)
  Top 0.152: v57.26,193.78 54.72,196.32 54.72,202.67 v55.77,203.72 | v87.74,198.86 88.38,199.5 v90.91,199.5 | v62.98,191.24 69.96,191.24 v74.09,195.37
  Top 0.406: v102.66,198.86 103.61,197.91 v103.61,196.95
  Bottom 0.152: TP1.TP-2 50.27,212.82 38.23,200.78 C2.2 35.88,200.78 38.18,198.48 38.18,193.74 41.72,190.2 U2.24 57.75,190.2 57.98,189.97 SJ5.1 | v57.26,193.78 58.53,192.51 SJ4.1 | SJ4.1 SJ5.1 | R1.1 R1.2 58.33,202.24 56.85,203.72 v55.77,203.72 | SJ5.1 SJ6.1 | 101.2,199.08 SJ1.1 101.2,199.37 | C1.2 85.84,197.59 85.5,197.26 U1.24 85.5,197.28 82.03,200.76 79.48,200.76 v74.09,195.37 | 87.72,198.84 v87.74,198.86 | SJ4.1 59.75,191.8 59.75,191.62 60.12,191.24 v62.98,191.24
  Bottom 0.406: U$2.1 122.58,220.45 101.2,199.08 | C1.2 87.72,198.84 | v90.91,199.5 92.19,200.76 99.81,200.76 101.2,199.37 | SJ3.1 SJ2.1 102.98,196.32 v103.61,196.95 | SJ1.1 v102.66,198.86